# EAGLE board PCB (EAGLE 9.7.0)
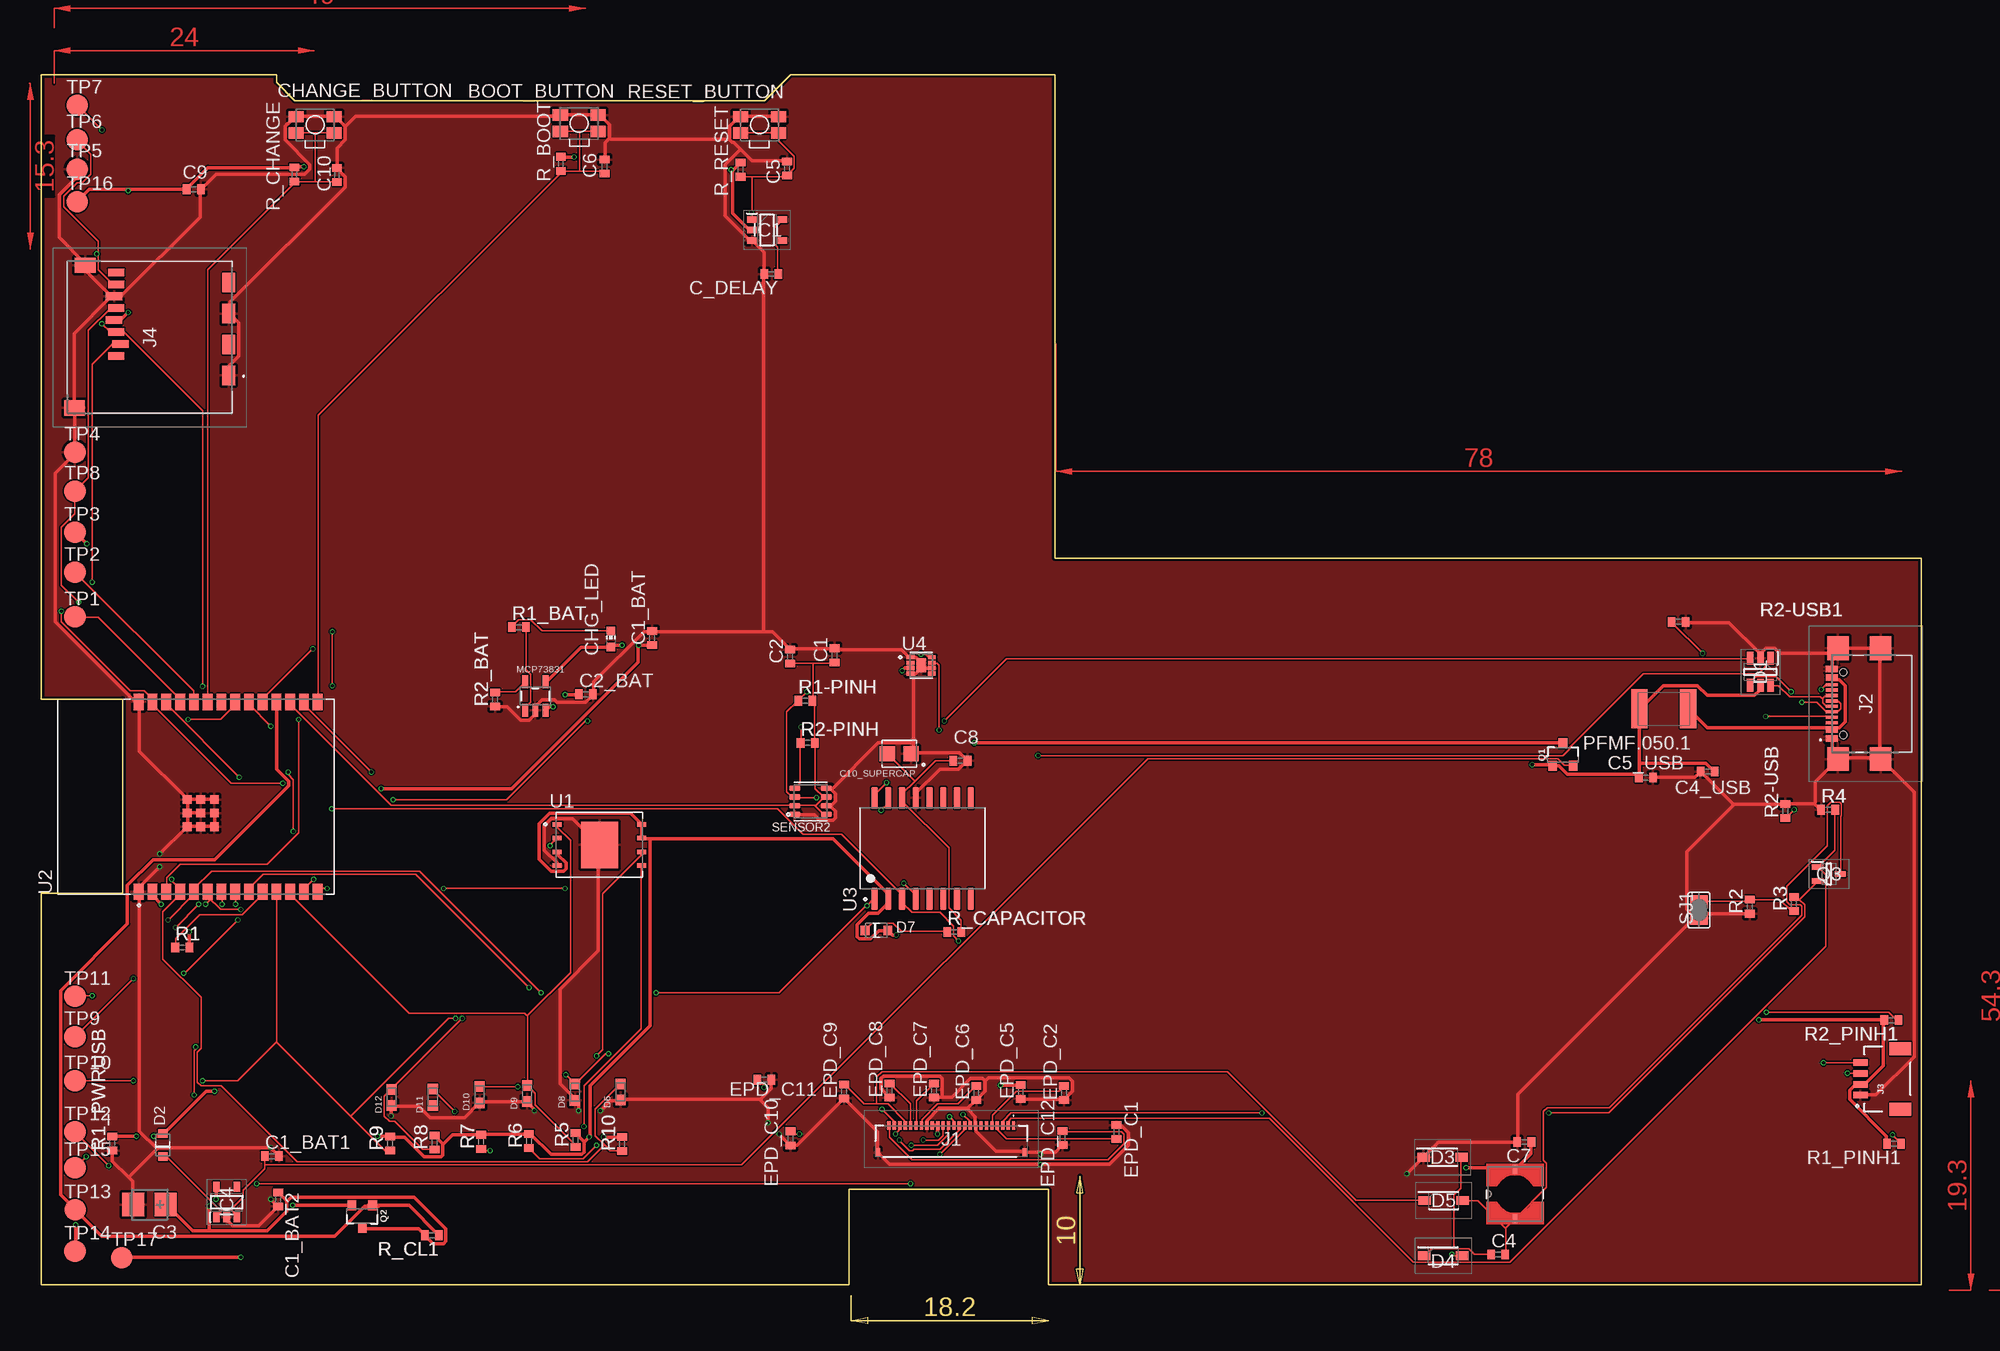
[diagram p0: board, top side]
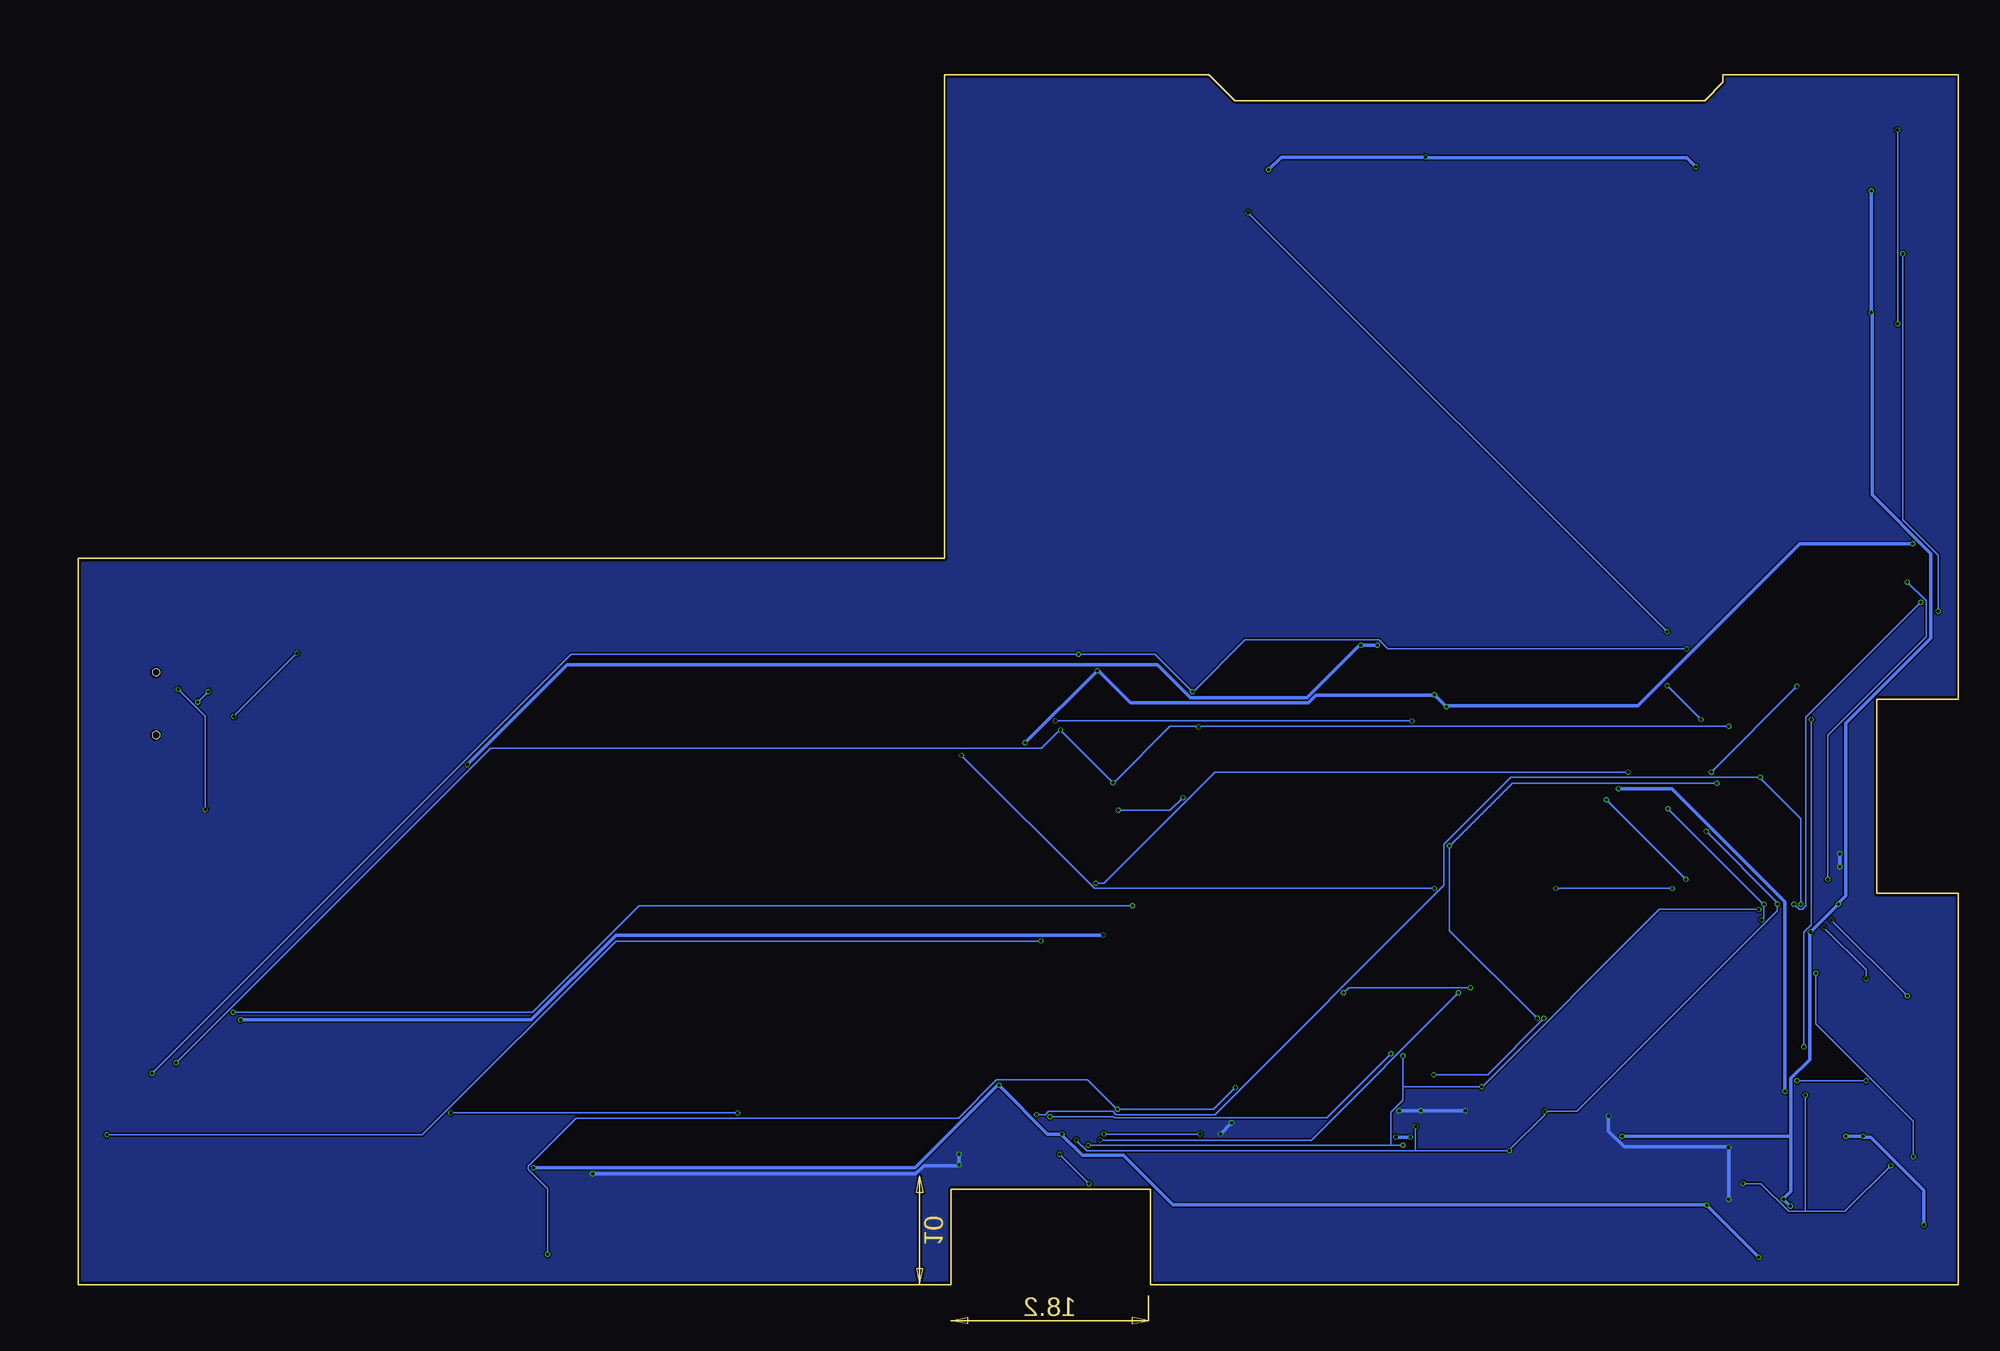
[diagram p1: board, bottom side, seen from below]

Size 173.4 x 115.2 mm. Coordinates in mm from the lower left corner, seen from the top.
Outline: 0,3.6 74.5,3.6 74.5,12.4 92.9,12.4 92.9,3.6 173.4,3.6 173.4,70.6 93.5,70.6 93.5,115.2 69.1,115.2 66.7,112.8 23.4,112.8 21.7,114.5 21.7,115.2 0,115.2 0,57.6 7.5,57.6 7.5,39.7 0,39.7 0,3.6
Copper layers (1*16): Top 0.035mm / dielectric 1.6mm / Bottom 0.035mm
Design rules "jlcpcb-2layers.dru": minimum track width 0.15mm, minimum drill 0.3mm, track to track 5mil, track to pad 5mil, pad to pad 5mil, via to via 5mil, smd to smd 5mil, copper to edge 0.2mm, drill to drill 6mil, minimum pad ring 10mil, minimum via ring 3mil, stop-mask expansion 4mil, vias tented up to drill 0mil, thermal gap 10mil
Net classes: 1 class-1: width 0.3 mm

## Footprints (pad centres in the part's own frame; a part is rotated, then mirrored left to right if it is on the bottom)
MYBUTTON = smd 1.4 x 1.05: 1 1.75,0.75; 2 -1.75,0.75; 3 -1.75,-0.75; 4 1.75,-0.75
ESP32_WROVER_EAGLE-LTSPICE_C0402 = smd 0.7 x 0.9: 1 -0.65,0; 2 0.65,0
RCL_CT3528 = smd 2 x 2.2: + -1.5,0; - 1.5,0
CAPCP3225X100N = smd 1.4 x 1.4: 1 -1.1,0; 2 1.1,0
ADAFRUIT_CHIP-LED0603 = smd 0.8 x 0.8: A 0,-0.75; C 0,0.75
SOT95P280X145-6N = smd 1.2 x 0.6: 1 -1.25,0.95; 2 -1.25,0; 3 -1.25,-0.95; 4 1.25,-0.95; 5 1.25,0; 6 1.25,0.95
ESP32_WROVER_AVX---SD0805S020S1R0_AVX_SD0805S020S1R0_0 = smd 0.8 x 0.9: 1 -1.05,0; 2 1.05,0
SOD3716X135N = smd 1.15 x 0.8: 1 -1.75,0; 2 1.75,0
DIOC1608X36N = smd 0.97 x 0.94: 1 -0.75,0; 2 0.75,0
SOT95P280X125-5N = smd 0.9 x 0.6: 1 -1.4,0.95; 2 -1.4,0; 3 -1.4,-0.95; 4 1.4,-0.95; 5 1.4,0.95
SOT95P280X120-5N = smd 0.9 x 0.6: 1 -1.4,0.95; 2 -1.4,0; 3 -1.4,-0.95; 4 1.4,-0.95; 5 1.4,0.95
FH34SRJ24S05SH99 = smd 0.3 x 0.8: 1 5.75,1.45; 2 5.25,1.45; 3 4.75,1.45; 4 4.25,1.45; 5 3.75,1.45; 6 3.25,1.45; 7 2.75,1.45; 8 2.25,1.45; 9 1.75,1.45; 10 1.25,1.45; 11 0.75,1.45; 12 0.25,1.45; 13 -0.25,1.45; 14 -0.75,1.45; 15 -1.25,1.45; 16 -1.75,1.45; 17 -2.25,1.45; 18 -2.75,1.45; 19 -3.25,1.45; 20 -3.75,1.45; 21 -4.25,1.45; 22 -4.75,1.45; 23 -5.25,1.45; 24 -5.75,1.45 | smd 0.4 x 0.8: MP1 6.75,-1.05; MP2 -6.75,-1.05
SAMACSYS_PARTS_USB4110GFA = smd 0.3 x 1.15: A1 -3.35,3.678; A4 -2.55,3.678; A5 -1.25,3.678; A6 -0.25,3.678; A7 0.25,3.678; A8 1.25,3.678; A9 2.55,3.678; A12 3.35,3.678; B1 3.05,3.678; B4 2.25,3.678; B5 1.75,3.678; B6 0.75,3.678; B7 -0.75,3.678; B8 -1.75,3.678; B9 -2.25,3.678; B12 -3.05,3.678 | smd 2.18 x 2: MP1 -5.11,-0.827; MP2 5.11,-0.827; MP3 -5.11,3.103; MP4 5.11,3.103 | hole 0.65: -2.89,2.603; 2.89,2.603
JST04_1MM_RA = smd 0.6 x 1.35: 1 -1.5,0; 2 -0.5,0; 3 0.5,0; 4 1.5,0 | smd 1.2 x 2: NC1 2.8,-3.675; NC2 -2.8,-3.675
112ATAARR03ATTEND = smd 1.8 x 1.2: G1 10.6,10.4; G2 4.9,10.4; S1 7.75,10.4; S2 2.05,10.4 | smd 1.4 x 1.9: G3 13.6,-3.85; G4 0.45,-2.85 | smd 0.7 x 1.5: P1 8.8,0; P2 7.7,0.4; P3 6.6,0; P4 5.5,-0.2; P5 4.4,0; P6 3.3,-0.2; P7 2.2,0; P8 1.1,0
IND_4828-WE-TPC_WRE = smd 0.813 x 0.406: 1 -2.286,0; 2 2.286,0
ESP32_WROVER_SPARKFUN-IC-POWER_SOT23-5 = smd 0.55 x 1.2: 1 -0.95,-1.3; 2 0,-1.3; 3 0.95,-1.3; 4 0.95,1.3; 5 -0.95,1.3
ESP32C6_VARISTOR_CT/CN1812 = smd 1.5 x 3.6: 1 -2.25,0; 2 2.25,0
ESP32_WROVER_SPARKFUN-DISCRETESEMI_SOT23-3 = smd 0.8 x 0.9: 1 -0.95,-1; 2 0.95,-1; 3 0,1.1
SOT65P210X110-3N = smd 1.05 x 0.5: 1 -1.05,0.65; 2 -1.05,-0.65; 3 1.05,0
ESP32_WROVER_EAGLE-LTSPICE_R0402 = smd 0.7 x 0.9: 1 -0.65,0; 2 0.65,0
ESP32_WROVER_BME680_PSON80P300X300X100-8N = smd 1.016 x 0.5: 1 1.458,1.2; 2 1.458,0.4; 3 1.458,-0.4; 4 1.458,-1.2; 5 -1.458,-1.22; 6 -1.458,-0.4; 7 -1.458,0.4; 8 -1.458,1.2
SJ = smd 1.168 x 1.6: 1 -0.762,0; 2 0.762,0
TP20R = smd 2 x 2: TP 0,0
SON127P600X800X80-9N = smd 0.94 x 0.44: 1 -3.895,1.905; 2 -3.895,0.635; 3 -3.895,-0.635; 4 -3.895,-1.905; 5 3.895,-1.905; 6 3.895,-0.635; 7 3.895,0.635; 8 3.895,1.905 | smd 3.4 x 4.3: 9 0,0
XCVR_ESP32-C6-WROOM-1-N8 = smd 1.5 x 0.9: 1 -8.75,5.26; 2 -8.75,3.99; 3 -8.75,2.72; 4 -8.75,1.45; 5 -8.75,0.18; 6 -8.75,-1.09; 7 -8.75,-2.36; 8 -8.75,-3.63; 9 -8.75,-4.9; 10 -8.75,-6.17; 11 -8.75,-7.44; 12 -8.75,-8.71; 13 -8.75,-9.98; 14 -8.75,-11.25; 15 8.75,-11.25; 16 8.75,-9.98; 17 8.75,-8.71; 18 8.75,-7.44; 19 8.75,-6.17; 20 8.75,-4.9; 21 8.75,-3.63; 22 8.75,-2.36; 23 8.75,-1.09; 24 8.75,0.18; 25 8.75,1.45; 26 8.75,2.72; 27 8.75,3.99; 28 8.75,5.26 | smd 0.8 x 0.8: 29_1 -2.755,0.79; 29_2 -1.505,0.79; 29_3 -0.255,0.79; 29_4 -2.755,-0.46; 29_5 -1.505,-0.46; 29_6 -0.255,-0.46; 29_7 -2.755,-1.71; 29_8 -1.505,-1.71; 29_9 -0.255,-1.71
SOIC127P1032X265-16N = smd 2.05 x 0.59: 1 -4.655,4.445; 2 -4.655,3.175; 3 -4.655,1.905; 4 -4.655,0.635; 5 -4.655,-0.635; 6 -4.655,-1.905; 7 -4.655,-3.175; 8 -4.655,-4.445; 9 4.655,-4.445; 10 4.655,-3.175; 11 4.655,-1.905; 12 4.655,-0.635; 13 4.655,0.635; 14 4.655,1.905; 15 4.655,3.175; 16 4.655,4.445
SON50P200X200X80-9N = smd 0.813 x 0.406: 1 -0.985,0.75; 2 -0.985,0.25; 3 -0.985,-0.25; 4 -0.985,-0.75; 5 0.985,-0.75; 6 0.985,-0.25; 7 0.985,0.25; 8 0.985,0.75 | smd 0.9 x 1.3: 9 0,0

## Placement (x,y rotation side)
BOOT_BUTTON  BUTTON_CUSYOMV1BUTON  [MYBUTTON]  49.63,110.71 0 top
C1  100nF  [ESP32_WROVER_EAGLE-LTSPICE_C0402]  73.17,61.65 90 top
C1_BAT  4.7uF  [ESP32_WROVER_EAGLE-LTSPICE_C0402]  56.35,63.24 90 top
C1_BAT1  4.7uF  [ESP32_WROVER_EAGLE-LTSPICE_C0402]  21.28,15.47 0 top
C1_BAT2  4.7uF  [ESP32_WROVER_EAGLE-LTSPICE_C0402]  21.87,11.48 270 top
C2  100nF  [ESP32_WROVER_EAGLE-LTSPICE_C0402]  69.07,61.53 90 top
C2_BAT  4.7uF  [ESP32_WROVER_EAGLE-LTSPICE_C0402]  50.25,58.05 0 top
C3  100uF TANT  [RCL_CT3528]  9.99,11 180 top
C4  4.7uF/25V  [ESP32_WROVER_EAGLE-LTSPICE_C0402]  134.39,6.39 0 top
C4_USB  100nF  [ESP32_WROVER_EAGLE-LTSPICE_C0402]  153.7,50.93 180 top
C5  1uF  [ESP32_WROVER_EAGLE-LTSPICE_C0402]  68.79,106.55 90 top
C5_USB  4.7uF  [ESP32_WROVER_EAGLE-LTSPICE_C0402]  148.01,50.37 0 top
C6  100nF  [ESP32_WROVER_EAGLE-LTSPICE_C0402]  51.97,106.71 90 top
C7  10uF  [ESP32_WROVER_EAGLE-LTSPICE_C0402]  136.8,16.77 180 top
C8  100nF  [ESP32_WROVER_EAGLE-LTSPICE_C0402]  84.79,51.93 0 top
C9  100nF  [ESP32_WROVER_EAGLE-LTSPICE_C0402]  14.07,104.63 0 top
C10  100nF  [ESP32_WROVER_EAGLE-LTSPICE_C0402]  27.27,105.95 90 top
C10_SUPERCAP  CPH3225ASUPERCAP  [CAPCP3225X100N]  79.14,52.56 180 top
C_DELAY  100nF  [ESP32_WROVER_EAGLE-LTSPICE_C0402]  67.33,96.81 180 top
CHANGE_BUTTON  BUTTON_CUSYOMV1BUTON  [MYBUTTON]  25.26,110.56 0 top
CHG_LED  [ADAFRUIT_CHIP-LED0603]  52.54,63.15 0 top
D1  USBLC6-2SC6YUSBL  [SOT95P280X145-6N]  158.57,60.12 270 top
D2  ESP32_WROVER_AVX---SD0805S020S1R0_AVX_SD0805S020S1R0_0_0  [ESP32_WROVER_AVX---SD0805S020S1R0_AVX_SD0805S020S1R0_0]  11.22,16.49 90 top
D3  MBR0530MBR  [SOD3716X135N]  129.26,15.37 0 top
D4  MBR0530MBR  [SOD3716X135N]  129.32,6.28 0 top
D5  MBR0530MBR  [SOD3716X135N]  129.36,11.38 0 top
D6  PGB1010603MRDIOC  [DIOC1608X36N]  53.43,21.38 90 top
D7  ESP32_WROVER_AVX---SD0805S020S1R0_AVX_SD0805S020S1R0_0_0  [ESP32_WROVER_AVX---SD0805S020S1R0_AVX_SD0805S020S1R0_0]  77.04,36.28 0 top
D8  PGB1010603MRDIOC  [DIOC1608X36N]  49.23,21.36 90 top
D9  PGB1010603MRDIOC  [DIOC1608X36N]  44.83,21.24 90 top
D10  PGB1010603MRDIOC  [DIOC1608X36N]  40.43,21.12 90 top
D11  PGB1010603MRDIOC  [DIOC1608X36N]  36.13,20.9 90 top
D12  PGB1010603MRDIOC  [DIOC1608X36N]  32.33,20.88 90 top
EPD_C1  1uF/50V  [ESP32_WROVER_EAGLE-LTSPICE_C0402]  99.17,17.68 270 top
EPD_C2  1uF/50V  [ESP32_WROVER_EAGLE-LTSPICE_C0402]  94.35,21.28 90 top
EPD_C5  1uF/50V  [ESP32_WROVER_EAGLE-LTSPICE_C0402]  90.35,21.39 90 top
EPD_C6  1uF/50V  [ESP32_WROVER_EAGLE-LTSPICE_C0402]  86.25,21.3 90 top
EPD_C7  1uF/50V  [ESP32_WROVER_EAGLE-LTSPICE_C0402]  82.35,21.51 90 top
EPD_C8  1uF/50V  [ESP32_WROVER_EAGLE-LTSPICE_C0402]  78.25,21.52 90 top
EPD_C9  1uF/50V  [ESP32_WROVER_EAGLE-LTSPICE_C0402]  74.05,21.43 90 top
EPD_C10  1uF/50V  [ESP32_WROVER_EAGLE-LTSPICE_C0402]  69.11,17.11 90 top
EPD_C11  1uF/50V  [ESP32_WROVER_EAGLE-LTSPICE_C0402]  66.71,22.51 180 top
EPD_C12  1uF/50V  [ESP32_WROVER_EAGLE-LTSPICE_C0402]  94.21,17.15 90 top
IC1  BD5229G-TRBD5229  [SOT95P280X125-5N]  66.95,100.87 0 top
IC4  XC6220A331MR-G  [SOT95P280X120-5N]  17.11,11.23 90 top
J1  FH34SRJ-24S-0.5SH_99_FH34  [FH34SRJ24S05SH99]  83.94,16.84 0 top
J2  SAMACSYS_PARTS_USB4110-GF-AUSB  [SAMACSYS_PARTS_USB4110GFA]  168.84,57.19 90 top
J3  QWIIC_RIGHT_ANGLE  [JST04_1MM_RA]  167.81,22.58 90 top
J4  112A-TAAR-R03_ATTENDSDCARD  [112ATAARR03ATTEND]  6.92,98.06 270 top
L1  68uH  [IND_4828-WE-TPC_WRE]  135.95,11.97 90 top
MCP73831  ESP32_WROVER_SPARKFUN-IC-POWER_MCP73831ICPOWER  [ESP32_WROVER_SPARKFUN-IC-POWER_SOT23-5]  45.58,57.89 0 top
PFMF.050.1  ESP32C6_VARISTOR  [ESP32C6_VARISTOR_CT/CN1812]  149.66,56.7 180 top
Q1  20V/4.2A/52mΩ/1.4W  [ESP32_WROVER_SPARKFUN-DISCRETESEMI_SOT23-3]  140.36,52.46 0 top
Q2  20V/4.2A/52mΩ/1.4W  [ESP32_WROVER_SPARKFUN-DISCRETESEMI_SOT23-3]  29.62,9.94 180 top
Q3  SI1308EDL-T1-GE3SI13  [SOT65P210X110-3N]  164.89,41.48 0 top
R1  10K  [ESP32_WROVER_EAGLE-LTSPICE_R0402]  13.01,34.71 0 top
R1-PINH  10K  [ESP32_WROVER_EAGLE-LTSPICE_R0402]  70.48,57.47 0 top
R1_BAT  200  [ESP32_WROVER_EAGLE-LTSPICE_R0402]  44.06,64.25 0 top
R1_PINH1  10K  [ESP32_WROVER_EAGLE-LTSPICE_R0402]  170.89,16.61 180 top
R1_PWRUSB  100K  [ESP32_WROVER_EAGLE-LTSPICE_R0402]  6.56,16.62 90 top
R2  2.2  [ESP32_WROVER_EAGLE-LTSPICE_R0402]  157.59,38.47 90 top
R2-PINH  10K  [ESP32_WROVER_EAGLE-LTSPICE_R0402]  70.69,53.57 0 top
R2-USB  5k1  [ESP32_WROVER_EAGLE-LTSPICE_R0402]  160.87,47.29 90 top
R2-USB1  5k1  [ESP32_WROVER_EAGLE-LTSPICE_R0402]  151.04,64.73 180 top
R2_BAT  2K  [ESP32_WROVER_EAGLE-LTSPICE_R0402]  41.87,57.58 90 top
R2_PINH1  10K  [ESP32_WROVER_EAGLE-LTSPICE_R0402]  170.65,28.01 180 top
R3  0.47  [ESP32_WROVER_EAGLE-LTSPICE_R0402]  161.67,38.72 90 top
R4  10K  [ESP32_WROVER_EAGLE-LTSPICE_R0402]  164.83,47.41 0 top
R5  10K  [ESP32_WROVER_EAGLE-LTSPICE_R0402]  49.29,16.95 90 top
R6  10K  [ESP32_WROVER_EAGLE-LTSPICE_R0402]  44.99,16.87 90 top
R7  10K  [ESP32_WROVER_EAGLE-LTSPICE_R0402]  40.59,16.79 90 top
R8  10K  [ESP32_WROVER_EAGLE-LTSPICE_R0402]  36.29,16.71 90 top
R9  10K  [ESP32_WROVER_EAGLE-LTSPICE_R0402]  32.19,16.63 90 top
R10  10K  [ESP32_WROVER_EAGLE-LTSPICE_R0402]  53.59,16.59 90 top
R_BOOT  10K  [ESP32_WROVER_EAGLE-LTSPICE_R0402]  47.93,106.97 90 top
R_CAPACITOR  15  [ESP32_WROVER_EAGLE-LTSPICE_R0402]  84.22,36.14 0 top
R_CHANGE  10K  [ESP32_WROVER_EAGLE-LTSPICE_R0402]  23.36,105.99 90 top
R_CL1  10K  [ESP32_WROVER_EAGLE-LTSPICE_R0402]  36.03,8.17 180 top
R_RESET  10K  [ESP32_WROVER_EAGLE-LTSPICE_R0402]  64.51,106.43 90 top
RESET_BUTTON  BUTTON_CUSYOMV1BUTON  [MYBUTTON]  66.25,110.56 0 top
SENSOR2  ESP32_WROVER_BME680_BME680BME  [ESP32_WROVER_BME680_PSON80P300X300X100-8N]  70.96,48.18 180 top
SJ1  [SJ]  152.91,38.16 90 top
TP1  TPMODEL  [TP20R]  3.12,65.19 0 top
TP2  TPMODEL  [TP20R]  3.12,69.29 0 top
TP3  TPMODEL  [TP20R]  3.12,72.99 0 top
TP4  TPTP20R  [TP20R]  3.12,80.39 0 top
TP5  TPTP20R  [TP20R]  3.32,106.49 0 top
TP6  TPTP20R  [TP20R]  3.32,109.19 0 top
TP7  TPMODEL  [TP20R]  3.32,112.38 0 top
TP8  TPMODEL  [TP20R]  3.12,76.79 0 top
TP9  TPMODEL  [TP20R]  3.12,26.49 0 top
TP10  TPMODEL  [TP20R]  3.12,22.41 0 top
TP11  TPTP20R  [TP20R]  3.12,30.19 0 top
TP12  TPMODEL  [TP20R]  3.12,17.71 0 top
TP13  TPMODEL  [TP20R]  3.12,10.51 0 top
TP14  TPTP20R  [TP20R]  3.12,6.71 0 top
TP15  TPMODEL  [TP20R]  3.12,14.41 0 top
TP16  TPMODEL  [TP20R]  3.32,103.49 0 top
TP17  TPMODEL  [TP20R]  7.44,6.12 0 top
U1  W25Q512JVEIQ"  [SON127P600X800X80-9N]  51.49,44.16 0 top
U2  ESP32-C6-WROOM-1-N8  [XCVR_ESP32-C6-WROOM-1-N8]  14.26,48.6 90 top
U3  DS3231SN#DS3231  [SOIC127P1032X265-16N]  81.3,43.85 90 top
U4  MAX17048G+T10MAX170  [SON50P200X200X80-9N]  81.17,60.72 0 top

## Library data of the parts
BOOT_BUTTON C1 C1_BAT C1_BAT1 C1_BAT2 C2 C2_BAT C3 C4 C4_USB C5 C5_USB C6-C10 C10_SUPERCAP C_DELAY CHANGE_BUTTON CHG_LED D1-D12 EPD_C1 EPD_C2 EPD_C5-EPD_C12 IC1 J1-J4 L1 MCP73831 PFMF.050.1 Q1-Q3 R1 R1-PINH R1_BAT R1_PINH1 R1_PWRUSB R2 R2-PINH R2-USB R2-USB1 R2_BAT R2_PINH1 R3-R10 R_BOOT R_CAPACITOR R_CHANGE R_CL1 R_RESET RESET_BUTTON SENSOR2 SJ1 TP1-TP17 U1-U4 = DeskAssistant v19 v1
IC4 = DeskAssistant v19 v1; DESCRIPTION: LDO Voltage Regulators; HEIGHT: 1.2mm; MANUFACTURER_NAME: Torex; MANUFACTURER_PART_NUMBER: XC6220A331MR-G; MOUSER_PART_NUMBER: 865-XC6220A331MR-G; MOUSER_PRICE-STOCK: https://www.mouser.co.uk/ProductDetail/Torex-Semiconductor/XC6220A331MR-G?qs=AsjdqWjXhJ8ZSWznL1J0gg%3D%3D

## Nets
3V3 [class-1]: C1_BAT2.1 C3.+ C9.1 D7.2 IC1.2 IC4.5 J3.2 J4.P4 Q2.3 R1.2 R1_PINH1.2 R2_PINH1.2 R5.2 R6.2 R7.2 R8.2 R9.2 R10.2 R_BOOT.2 R_CHANGE.2 R_CL1.2 R_RESET.2 TP16.TP U1.3 U1.7 U1.8 U2.2 U3.2
32KHZ: R2_PINH1.1 U2.9 U3.1
DN: D1.4 J2.A7 J2.B7
DP: D1.6 J2.A6 J2.B6
EPD_3V3 [class-1]: C7.1 EPD_C5.2 J1.15 J1.16 L1.2 Q2.2 TP17.TP
EPD_3V3_C [class-1]: Q2.1 R_CL1.1 TP13.TP U2.18
EPD_BUSY: J1.9 TP9.TP U2.26
EPD_CS: D8.2 J1.12 R9.1 TP10.TP U2.11
EPD_DC: J1.11 TP11.TP U2.5
EPD_RST: J1.10 TP12.TP U2.21
FLASH_CS: D9.2 R5.1 U1.1 U2.12
GDR: J1.2 Q3.1 R4.2
GND [class-1]: BOOT_BUTTON.1 BOOT_BUTTON.2 C1.2 C1_BAT1.2 C1_BAT2.2 C1_BAT.2 C2.2 C2_BAT.2 C3.- C4_USB.2 C5.2 C5_USB.2 C6.2 C7.2 C8.2 C9.2 C10.2 C10_SUPERCAP.1 C_DELAY.2 CHANGE_BUTTON.1 CHANGE_BUTTON.2 D1.2 D3.1 D6.1 D8.1 D9.1 D10.1 D12.1 EPD_C1.1 EPD_C2.1 EPD_C5.1 EPD_C6.1 EPD_C7.1 EPD_C8.1 EPD_C9.1 EPD_C10.1 EPD_C11.1 EPD_C12.1 IC1.3 IC4.2 J1.8 J1.17 J1.MP1 J1.MP2 J2.A1 J2.A12 J2.B1 J2.B12 J2.MP1 J2.MP2 J2.MP3 J2.MP4 J3.1 J4.G1 J4.G2 J4.G3 J4.G4 J4.P6 MCP73831.2 R1_PWRUSB.1 R2-USB1.1 R2-USB.2 R2.1 R2_BAT.1 R4.1 RESET_BUTTON.1 RESET_BUTTON.2 SENSOR2.1 SENSOR2.5 SENSOR2.7 SJ1.1 TP4.TP TP5.TP U1.4 U1.9 U2.1 U2.28 U2.29_1 U2.29_2 U2.29_3 U2.29_4 U2.29_5 U2.29_6 U2.29_7 U2.29_8 U2.29_9 U3.13 U4.1 U4.4 U4.6 U4.9
GPIO8: R1.1 U2.10
I2C_PW: C1.1 C2.1 R1-PINH.2 R2-PINH.2 SENSOR2.2 SENSOR2.6 SENSOR2.8 U2.17
INT_RTC: R1_PINH1.1 TP15.TP U2.8 U3.3
IO/BOOT: BOOT_BUTTON.3 BOOT_BUTTON.4 C6.1 R_BOOT.1 U2.15
IO/CHANGE: C10.1 CHANGE_BUTTON.3 CHANGE_BUTTON.4 R_CHANGE.1 U2.23
MISO: D12.2 J4.P7 R8.1 TP6.TP U1.2 U2.27
MOSI: D11.2 J1.14 J4.P3 R7.1 TP7.TP U1.5 U2.7
N$1: J2.B5 R2-USB.1
N$2: J2.A5 R2-USB1.2
N$3: C1_BAT1.1 D2.1 IC4.1 IC4.3 Q1.2
N$4: C4.1 D3.2 D4.1
N$5: CHG_LED.C R1_BAT.1
N$6: MCP73831.1 R1_BAT.2
N$7: MCP73831.5 R2_BAT.2
N$8: EPD_C12.2 J1.24
N$9: EPD_C8.2 J1.20
N$10: EPD_C10.2 J1.22
N$11: EPD_C7.2 J1.19
N$12: EPD_C6.2 J1.18
N$13: EPD_C2.2 J1.5
N$14: EPD_C1.2 J1.4
N$15: C_DELAY.1 IC1.5
N$16: D7.1 R_CAPACITOR.1
N$26: D11.1
PREVGH: D5.1 EPD_C9.2 J1.21
PREVGL: D4.2 EPD_C11.2 J1.23
RESE: J1.3 Q3.2 R3.2
RESE': R2.2 R3.1 SJ1.2
RESET: C5.1 IC1.1 R_RESET.1 RESET_BUTTON.3 RESET_BUTTON.4 U2.3
RTC_RST: U2.16 U3.4
RX: TP2.TP U2.24
SCK: D10.2 J1.13 J4.P5 R6.1 TP8.TP U1.6 U2.6
SCL: J3.4 R2-PINH.1 SENSOR2.4 U2.20 U3.16 U4.7
SDA: J3.3 R1-PINH.1 SENSOR2.3 U2.19 U3.15 U4.8
SRC: C4.2 D5.2 L1.1 Q3.3
SS_SD: D6.2 J4.P2 R10.1 U2.4
TX: TP1.TP U2.25
USB_D+: D1.1 U2.14
USB_D-: D1.3 U2.13
VBAT [class-1]: C2_BAT.1 MCP73831.3 Q1.3 TP3.TP U4.2 U4.3
VBUS [class-1]: C1_BAT.1 C4_USB.1 C5_USB.1 CHG_LED.A D1.5 D2.2 MCP73831.4 PFMF.050.1.2 Q1.1 R1_PWRUSB.2 TP14.TP
VRTC: C8.1 C10_SUPERCAP.2 R_CAPACITOR.2 U3.14
VUSB [class-1]: J2.A4 J2.A9 J2.B4 J2.B9 PFMF.050.1.1

## Tracks (layer width: path | path; a pad name or v marks a point on that pad's centre or on a via)
3V3  (via drill 0.3)
  Top 0.3: 63.77,106.35 63.77,102.4 65.29,100.88 65.5,100.88 IC1.2 | 63.77,106.35 64.46,107.04 R_RESET.2 | v49.16,107.6 47.98,107.6 R_BOOT.2 | v63.63,106.42 63.77,106.35 | 8.03,104.62 4.42,104.62 3.32,103.51 TP16.TP | 8.03,104.62 13.36,104.62 C9.1 13.5,104.76 15.37,106.63 23.33,106.63 R_CHANGE.2 23.47,106.7 v24.23,106.7 | v8.03,93.26 7.33,92.57 6.78,92.57 J4.P4 | v8.03,104.48 8.03,104.62 | v13.63,36.13 13.63,34.75 R1.2 | v11.07,38.69 10.31,39.46 10.31,39.8 U2.2 | 22.64,11.34 21.88,12.1 C1_BAT2.1 | 22.64,11.34 22.64,10.37 20.84,8.57 15.5,8.57 | 15.5,8.57 13.98,8.57 11.56,10.99 C3.+ | v16.13,11.48 16.13,12.59 IC4.5 | 15.5,8.57 v15.5,10.86 | 22.64,11.34 22.78,11.41 23.05,11.69 34.41,11.69 37.32,8.78 37.32,7.6 37.11,7.39 36.14,7.39 35.45,8.09 R_CL1.2 35.38,8.22 34.83,8.78 29.68,8.78 Q2.3 | 37.04,16.6 37.04,15.56 36.9,15.43 35.31,15.43 33.51,17.23 32.19,17.23 R9.2 32.05,17.3 v31.02,17.3 | 37.04,16.6 36.35,17.3 R8.2 | 37.04,16.6 37.18,16.67 37.94,17.43 40.57,17.43 R7.2 40.71,17.5 44.94,17.5 R6.2 45.14,17.5 47.01,15.63 49.85,15.63 50.06,15.84 50.06,16.81 | 50.06,16.81 49.3,17.57 R5.2 | v51.86,17.23 53.52,17.23 R10.2 | 50.06,16.81 50.2,16.88 v50.54,17.23 50.61,17.37 50.61,21.94 56.15,27.48 56.15,44.72 | R1_PINH1.2 170.21,16.67 170.21,17.3 166.81,20.69 166.81,21.52 167.37,22.07 167.78,22.07 J3.2 167.92,22.14 168.27,22.14 169.93,23.8 169.93,27.96 R2_PINH1.2 169.79,28.03 v158.44,28.03 | U1.3 47.64,43.47 47.64,43.27 48.4,42.5 48.4,41.95 48.19,41.74 47.01,41.74 45.91,42.85 45.91,46.1 46.87,47.07 54.35,47.07 55.32,46.1 U1.8 55.39,45.97 55.39,44.86 U1.7 55.46,44.72 56.15,44.72
  Top 0.3: 56.15,44.72 73.05,44.72 78.04,39.73 78.04,39.32 U3.2 78.11,39.18 78.11,38.76 77.21,37.86 76.31,37.86 75.27,36.83 75.27,35.72 75.47,35.51 76.51,35.51 77.27,36.27 78.04,36.27 D7.2 78.17,36.2 78.52,35.86 v78.87,35.86
  Bottom 0.3: v63.63,106.42 62.45,107.6 v49.16,107.6 49.02,107.53 25.06,107.53 v24.23,106.7 | v8.03,104.48 v8.03,93.26 7.96,93.12 7.96,76.44 2.55,71.03 2.55,63.21 10.38,55.38 10.38,39.46 11,38.83 v11.07,38.69 v13.63,36.13 13.7,35.99 13.7,24.36 15.44,22.63 15.44,17.3 | v15.5,10.86 v16.13,11.48 16.06,11.62 15.44,12.24 15.44,17.3 | v50.54,17.23 v51.86,17.23 | v158.44,28.03 131.64,28.03 123.81,35.86 v78.87,35.86 | v31.02,17.3 15.44,17.3
32KHZ  (via drill 0.3)
  Top 0.15: v159.13,28.72 170.42,28.72 171.11,28.03 171.25,28.03 R2_PINH1.1 | U3.1 76.79,39.18 v76.17,38.56 76.1,38.56 68.06,30.52 v56.71,30.52 | v45,31.01 34.55,41.46 20.49,41.46 19.17,40.15 19.17,39.87 U2.9
  Bottom 0.15: v159.13,28.72 131.5,28.72 121.66,38.56 v76.17,38.56 | v45,31.01 56.22,31.01 v56.71,30.52
DN  (via drill 0.3)
  Top 0.15: J2.A7 165.22,57.39 165.78,57.39 165.98,57.18 165.98,56.7 165.78,56.49 165.22,56.49 J2.B7 165.15,56.49 164.6,56.49 163.77,57.32 v162.38,57.32 | v161.41,58.29 160.03,59.68 158.16,59.68 157.67,59.19 157.67,58.91 D1.4
  Bottom 0.15: v162.38,57.32 v161.41,58.29
DP
  Top 0.15: 164.32,57.67 164.32,57.25 164.6,56.98 165.15,56.98 J2.A6 | 164.32,57.67 164.53,57.88 165.15,57.88 J2.B6 | D1.6 159.54,58.85 160.24,58.85 161.28,57.81 164.11,57.81 164.25,57.67 164.32,57.67
EPD_3V3  (via drill 0.3)
  Top 0.3: v23.19,10.93 28.66,10.93 Q2.2 | v18.41,6.15 7.47,6.15 TP17.TP | C7.1 137.38,16.74 137.38,15.7 136,14.32 L1.2 135.86,14.39 v131.43,14.39 | J1.16 82.19,18.34 82.68,18.34 J1.15 82.68,18.2 v82.68,17.5 | v88.49,22 90.29,22 EPD_C5.2
  Bottom 0.3: v18.41,6.15 v23.19,10.93 23.33,10.99 72.43,10.99 77,15.56 80.81,15.56 82.61,17.37 v82.68,17.5 83.99,17.5 v88.49,22 88.63,22 96.25,14.39 v131.43,14.39
EPD_3V3_C
  Top 0.3: 31.2,10.93 33.93,10.93 36.62,8.22 R_CL1.1 | 30.6,10.93 Q2.1 30.46,10.86 | U2.18 21.74,57.32 21.74,51.16 22.84,50.05 22.84,49.64 15.99,42.78 10.31,42.78 7.96,40.42 7.96,36.89 1.79,30.73 1.79,11.89 3.11,10.58 TP13.TP 3.25,10.44 5.6,8.09 27.07,8.09 29.84,10.86 30.1,10.86 | 30.1,10.86 30.46,10.86 | 30.1,10.86 30.17,10.93 30.6,10.93 | 31.2,10.93 31.13,10.86 30.46,10.86 | 31.2,10.93 30.6,10.93
EPD_BUSY  (via drill 0.3)
  Top 0.15: v85.03,19.3 85.65,18.68 85.65,18.34 J1.9 | v18.27,50.4 11.56,57.12 11.56,57.32 U2.26 | v8.51,31.84 3.18,26.51 TP9.TP | v14.53,38.69 v12.39,36.55
  Bottom 0.15: v85.03,19.3 84.2,19.3 83.92,19.58 77.97,19.58 77.69,19.3 68.55,19.3 47.43,40.42 47.43,44.23 41.27,50.4 v18.27,50.4 18.27,50.33 14.53,46.59 v14.53,38.69 | v8.51,31.84 8.51,32.67 v12.39,36.55
EPD_CS  (via drill 0.3)
  Top 0.15: v83.78,19.1 84.13,18.75 84.13,18.34 J1.12 | v52.34,24.91 52.07,24.91 49.3,22.14 D8.2 49.23,22.14 v48.4,22.97 | 21.74,25.95 28.56,19.13 | 28.56,19.13 31.71,15.98 32.12,15.98 R9.1 | 21.74,25.95 21.74,39.8 U2.11 | v8.51,22.42 3.18,22.42 TP10.TP | v14.88,22.42 18.14,22.42 21.67,25.95 21.74,25.95 | v38.22,28.17 37.59,28.17 28.56,19.13
  Bottom 0.15: v83.78,19.1 77.9,19.1 77.83,19.03 58.23,19.03 v52.34,24.91 | v14.88,22.42 v8.51,22.42 | v48.4,22.97 43.41,22.97 v38.22,28.17
EPD_DC  (via drill 0.3)
  Top 0.15: v79.14,16.95 80.11,15.98 80.39,15.98 80.53,16.12 82.88,16.12 84.68,17.92 84.68,18.27 J1.11 | v46.11,30.52 34.89,41.74 15.71,41.74 14.12,40.15 14.12,39.87 U2.5 14.05,39.8 14.05,39.59 v11.7,37.24 | v4.7,30.25 3.18,30.25 TP11.TP
  Bottom 0.15: v79.14,16.95 59.69,16.95 v46.11,30.52 | v11.7,37.24 v4.7,30.25
EPD_RST  (via drill 0.3)
  Top 0.15: v82.88,15.63 85.17,17.92 85.17,18.27 J1.10 | v19.87,12.93 v80.18,12.93 | v6.22,14.6 3.18,17.64 TP12.TP | v13.56,55.73 16.54,55.73 17.86,57.05 17.86,57.32 U2.21 | v14.26,25.54 14.26,25.33 14.12,25.19 v14.12,21.11
  Bottom 0.15: v80.18,12.93 v82.88,15.63 | v19.87,12.93 18.21,12.93 15.64,10.37 14.12,10.37 | 14.12,10.37 10.45,10.37 v6.22,14.6 | v13.56,55.73 13.56,36.83 14.26,36.13 v14.26,25.54 | 14.12,10.37 v14.12,21.11
FLASH_CS
  Top 0.15: R5.1 49.23,16.33 49.23,16.53 45.56,20.2 45.56,21.24 44.87,21.94 D9.2 44.87,22 44.87,28.45 | 44.87,28.45 48.81,32.39 48.81,44.58 47.64,45.76 47.64,46.03 U1.1 | U2.12 22.98,39.8 22.98,39.59 33.93,28.65 44.59,28.65 44.8,28.45 44.87,28.45
GDR
  Top 0.15: J1.2 89.25,18.34 89.25,18.75 89.46,18.96 113.28,18.96 126.58,5.66 135.44,5.66 164.6,34.82 164.6,41.4 163.91,42.09 Q3.1 163.91,42.16 165.43,43.68 165.43,47.35 R4.2
GND  (via drill 0.3)
  Top 0.3: R2_BAT.1 41.89,56.91 43,56.91 44.24,55.66 45,55.66 45.56,56.22 45.56,56.56 MCP73831.2 45.63,56.7 45.63,56.98 46.18,57.53 47.36,57.53 47.57,57.32 50.2,57.32 50.89,58.02 C2_BAT.2 50.96,58.15 50.96,59.19 55.6,63.83 56.29,63.83 C1_BAT.2 56.5,63.83 66.61,63.83 | SENSOR2.1 69.52,46.94 71.32,46.94 71.8,46.45 73.05,46.45 73.26,46.66 73.26,47.28 72.77,47.77 72.43,47.77 SENSOR2.7 72.91,47.84 73.26,48.18 73.26,48.87 72.88,49.26 | 72.88,49.26 72.77,49.36 72.43,49.36 SENSOR2.5 | 81.15,60.47 81.15,60.44 80.67,59.95 80.25,59.95 U4.4 80.46,59.82 80.46,53.58 | 80.46,53.58 80.46,52.82 C10_SUPERCAP.1 80.25,52.61 80.32,52.68 84.68,52.68 85.38,51.99 C8.2 85.31,51.85 84.62,51.16 82.88,51.16 80.67,48.94 80.67,48.53 U3.13 | 72.88,49.26 77.21,53.58 80.46,53.58 | 66.61,63.83 67.44,63.83 68.96,62.31 C2.2 69.1,62.24 73.12,62.24 C1.2 73.26,62.17 79.35,62.17 80.04,61.48 U4.1 80.25,61.48 80.67,61.48 81.08,61.06 81.08,60.85 U4.9 81.15,60.72 81.15,60.5 81.15,60.47 | 52.41,109.33 52,108.91 52,107.39 C6.2 | 52.41,109.33 52.41,110.58 51.58,111.41 51.45,111.41 BOOT_BUTTON.1 51.24,111.48 47.91,111.48 BOOT_BUTTON.2 47.77,111.34 29.01,111.34 28.18,110.51 28.04,110.44 | 64.5,108.33 63.84,108.98 63.7,108.98 63.49,109.19 | 64.5,108.33 65.57,107.25 68.76,107.25 C5.2 | 63.49,109.19 63.49,110.44 64.33,111.27 64.46,111.27 RESET_BUTTON.2 64.6,111.34 67.99,111.34 RESET_BUTTON.1 | 64.5,108.33 63.08,106.91 63.08,102.2 65.29,99.98 65.43,99.98 IC1.3 65.57,99.91 66.68,98.8 66.68,96.86 C_DELAY.2 66.61,96.73 66.61,63.83 | 52.41,109.33 52.55,109.26 63.36,109.26 63.49,109.19
  Top 0.3: J4.G1 17.37,87.52 17.37,88.42 18.21,89.25 18.21,92.29 17.37,93.12 J4.G2 17.44,93.26 17.44,94.23 28.04,104.83 28.04,105.8 27.35,106.49 C10.2 27.28,106.63 27.28,108.43 28.04,109.19 28.04,110.44 | 28.04,110.44 27.21,111.27 27.07,111.27 CHANGE_BUTTON.1 26.86,111.34 23.54,111.34 CHANGE_BUTTON.2 23.4,111.27 22.78,110.64 22.71,110.64 22.5,110.44 22.5,109.19 24.78,106.91 24.78,106.49 24.3,106 16.13,106 14.81,104.69 C9.2 14.67,104.62 14.67,102.06 7.4,94.79 6.78,94.79 J4.P6 | U2.29_1 13.5,45.9 13.5,47.07 U2.29_2 | U2.29_3 13.5,48.32 13.5,47.21 U2.29_2 | U2.29_1 13.63,45.9 14.67,45.9 U2.29_4 14.81,45.9 15.92,45.9 U2.29_7 15.99,46.03 15.99,47.07 U2.29_8 | U2.29_5 14.67,47.14 13.63,47.14 U2.29_2 | U2.29_3 13.63,48.39 14.67,48.39 U2.29_6 14.81,48.39 15.92,48.39 U2.29_9 | U2.29_3 13.43,48.46 9.06,52.82 9.06,57.32 U2.28 8.86,57.39 8.65,57.39 1.31,64.73 1.31,78.44 3.11,80.24 TP4.TP 3.11,80.45 3.11,84.4 J4.G3 3.04,84.61 3.04,91.32 6.36,94.65 J4.P6 | J4.P6 6.57,94.79 6.43,94.79 4.08,97.14 4.08,97.56 J4.G4 4.08,97.76 1.65,100.19 1.65,104.14 3.32,105.8 TP5.TP | J2.B1 165.15,60.3 165.15,60.51 J2.A12 165.22,60.65 165.22,61.76 165.71,62.24 J2.MP4 | J2.MP4 165.85,62.31 169.65,62.31 J2.MP2 169.59,62.17 169.59,52.2 J2.MP1 | R2-USB1.1 151.72,64.66 155.67,64.66 158.5,61.82 158.5,61.41 D1.2 158.64,61.89 159.06,62.31 159.89,62.31 160.38,61.82 165.08,61.82 J2.MP4 | J3.1 167.85,21.11 169.24,21.11 172.77,24.64 172.77,49.01 169.72,52.06 J2.MP1 | R2.1 157.54,37.79 153.31,37.79 152.97,37.45 SJ1.1 | C5_USB.2 148.67,50.4 152.55,50.4 153.03,50.88 C4_USB.2 153.17,50.81 156.08,47.9
  Top 0.3: 163.56,47.97 160.93,47.97 R2-USB.2 160.72,47.9 156.08,47.9 | 163.56,47.97 164.11,47.42 R4.1 | J2.B12 165.15,53.86 J2.A1 165.22,53.72 165.22,52.61 165.71,52.13 J2.MP3 | 163.56,47.97 163.63,48.11 163.63,49.98 165.64,51.99 J2.MP3 | SJ1.1 152.83,37.52 152.48,37.52 151.79,38.21 151.79,43.54 156.01,47.77 156.08,47.9 | SJ1.1 152.41,37.38 136.21,21.17 136.21,16.88 C7.2 136.14,16.74 128.87,16.74 127.55,15.43 D3.1 127.41,15.29 v125.96,13.83 | J2.MP1 169.45,52.2 165.85,52.2 J2.MP3 | IC4.2 17.17,9.82 17.17,9.54 17.65,9.05 20.07,9.05 21.81,10.79 C1_BAT2.2 21.74,10.93 v21.18,11.48 | 8.06,13.52 8.44,13.14 8.44,11.06 C3.- | 8.06,13.52 6.57,15.01 6.57,15.91 R1_PWRUSB.1 | 21.15,16.22 21.11,16.26 10.79,16.26 10.69,16.15 | 21.15,16.22 21.88,15.49 C1_BAT1.2 | 8.06,13.52 10.69,16.15 | 10.69,16.15 9.06,17.78 9.06,39.8 U2.1 9.13,39.94 9.13,40.36 v10.93,42.16 | v21.18,16.26 21.15,16.22 | v32.26,19.17 32.26,19.93 D12.1 32.33,20.07 34.83,20.07 35.86,19.03 39.05,19.03 40.37,20.34 D10.1 40.5,20.48 44.8,20.48 D9.1 44.87,20.34 45.49,19.72 v45.49,19.65 | EPD_C5.1 90.36,20.69 94.31,20.69 EPD_C2.1 94.45,20.76 95.14,21.45 95.14,22.35 94.79,22.7 87.38,22.7 87.18,22.49 87.04,22.42 | 92.16,15.84 93.55,15.84 94.17,16.46 EPD_C12.1 | 92.16,15.84 90.71,15.84 J1.MP1 90.57,15.91 88.08,15.91 86.21,17.78 86.21,18.2 J1.8 86.14,18.34 86.14,19.1 85.52,19.72 85.45,19.86 | 85.45,19.86 82.81,19.86 81.71,18.75 81.71,18.34 J1.17 | 85.45,19.86 86.21,20.62 EPD_C6.1 86.35,20.76 87.04,21.45 87.04,22.42 | 83.09,20.9 83.99,20.9 85.72,22.63 86.83,22.63 87.04,22.42 | 83.09,20.9 82.4,20.9 EPD_C7.1 | 83.09,20.9 83.09,22.63 82.88,22.84 77.69,22.84 77.48,22.63 77.48,21.66 78.24,20.9 EPD_C8.1
  Top 0.3: 92.16,14.73 78.24,14.73 77.27,15.7 J1.MP2 77.14,15.84 77.14,17.71 74.09,20.76 EPD_C9.1 73.95,20.69 69.73,16.46 69.17,16.46 EPD_C10.1 69.03,16.53 v68.06,17.5 | 92.16,14.73 98.53,14.73 100.27,16.46 100.27,17.64 99.64,18.27 99.23,18.27 EPD_C1.1 | v92.16,15.63 92.16,15.84 | v92.16,14.66 92.16,14.73 | 66.33,20.69 67.3,21.66 67.3,22.49 EPD_C11.1 | 66.33,20.69 53.45,20.69 D6.1 53.32,20.55 52.48,20.55 v51.58,19.65 | U1.4 47.57,42.3 47.57,42.5 46.39,43.68 46.39,45.97 47.01,46.59 49.02,46.59 51.45,44.16 U1.9 51.38,44.03 51.38,34.4 47.84,30.87 47.84,22.14 49.23,20.76 D8.1 49.3,20.48 49.58,20.2 v49.58,19.65 | v67.03,18.54 67.03,19.93 66.4,20.55 66.33,20.69 | v10.93,43.33 13.36,45.76 U2.29_1 | U4.6 81.15,60.47
  Bottom 0.3: v21.18,11.48 v21.18,16.26 21.32,16.33 30.81,16.33 32.26,17.78 v32.26,19.17 | v92.16,15.63 v92.16,14.66 92.3,14.6 95.42,14.6 96.18,13.83 v125.96,13.83 | v51.58,19.65 v49.58,19.65 v45.49,19.65 | v67.03,18.54 v68.06,17.5 | v10.93,42.16 v10.93,43.33
  pour Top: 76.56,9.86 76.58,9.88 91.22,9.88 91.24,9.86 91.26,9.84 91.28,9.82 91.28,2.18 174.62,2.18 174.62,71.32 94.28,71.32 94.26,71.34 94.24,71.36 94.22,71.38 94.22,72.92 94.24,72.94 94.26,72.96 94.28,72.98 95.92,72.98 95.92,117.42 -1.42,117.42 -1.42,2.48 77.02,2.48 77.02,3.22 76.58,3.22 76.56,3.24 76.54,3.26 76.52,3.28 76.52,9.82 76.54,9.84
  pour Bottom: 76.46,10.36 76.48,10.38 90.82,10.38 90.84,10.36 90.86,10.34 90.88,10.32 90.88,1.18 91.02,1.18 91.02,2.32 91.04,2.34 91.06,2.36 91.08,2.38 175.42,2.38 175.42,71.52 95.68,71.52 95.66,71.54 95.64,71.56 95.62,71.58 95.62,118.22 -1.22,118.22 -1.22,3.18 76.42,3.18 76.42,10.32 76.44,10.34
GPIO8
  Top 0.15: R1.1 12.39,34.75 12.39,35.51 14.6,37.73 18.55,37.73 20.42,39.59 20.42,39.8 U2.10
I2C_PW
  Top 0.15: 71.18,60.92 73.05,60.92 73.12,60.99 C1.1 | 71.18,60.92 69.1,60.92 C2.1 | 71.18,60.92 71.18,57.53 R1-PINH.2 71.18,57.46 71.32,57.32 71.32,53.58 R2-PINH.2 71.39,53.51 71.39,49.36 72.15,48.6 SENSOR2.6 72.36,48.53 72.15,48.53 71.46,47.84 71.39,47.84 | 71.39,47.84 69.52,47.84 SENSOR2.2 69.45,47.84 32.26,47.84 22.98,57.12 22.98,57.32 U2.17 | SENSOR2.8 72.36,47 72.15,47 71.39,47.77 71.39,47.84
INT_RTC  (via drill 0.3)
  Top 0.15: v17.93,38.69 17.93,39.8 U2.8 | v18.14,37.24 13.22,32.32 v13.15,32.32 | v4.15,15.43 3.18,14.46 TP15.TP | v170.76,17.43 171.52,16.67 R1_PINH1.1 | v84.62,35.3 84.13,35.79 84.13,36.69 82.88,37.93 80.32,37.93 79.42,38.83 79.42,39.18 U3.3 79.35,39.25 79.35,39.59 73.81,45.13 70.28,45.13 67.93,47.49 v26.79,47.49
  Bottom 0.15: v18.14,37.24 17.93,37.45 v17.93,38.69 18,38.69 v26.79,47.49 | v13.15,32.32 13.15,27.68 4.15,18.68 v4.15,15.43 | v170.76,17.43 141.68,17.43 123.81,35.3 v84.62,35.3
IO/BOOT
  Top 0.15: 49.64,109.95 BOOT_BUTTON.4 | 49.64,109.95 47.91,109.95 BOOT_BUTTON.3 | 49.64,106.28 51.72,106.28 51.93,106.08 C6.1 | 49.64,106.28 47.98,106.28 R_BOOT.1 47.98,106.21 25.55,83.78 25.55,57.39 U2.15 | 49.64,106.28 49.64,109.95
IO/CHANGE
  Top 0.15: 25.27,109.81 CHANGE_BUTTON.4 | 25.27,109.81 23.54,109.81 CHANGE_BUTTON.3 | 25.27,105.31 27.21,105.31 C10.1 | 25.27,105.31 23.4,105.31 R_CHANGE.1 23.4,105.24 15.37,97.21 15.37,57.39 U2.23 | 25.27,105.31 25.27,109.81
MISO  (via drill 0.3)
  Top 0.15: 5.26,98.67 5.26,99.84 2.07,103.03 2.07,104 3.32,105.24 3.8,105.24 4.56,106 4.56,107.88 3.32,109.12 TP6.TP | 5.26,98.67 5.26,97.21 6.57,95.89 6.85,95.89 J4.P7 | R8.1 36.28,16.12 35.17,16.12 32.61,18.68 32.12,18.68 31.64,19.17 31.64,20.97 32.26,21.59 D12.2 32.33,21.66 v38.84,28.17 | v46.94,44.1 46.94,44.16 47.57,44.79 U1.2 | v22.29,49.84 17.51,49.84 10.31,57.05 10.31,57.32 U2.27 10.24,57.39 10.24,57.6 9.48,58.36 8.23,58.36 1.86,64.73 v1.86,65.7 | v5.12,98.67 5.26,98.67
  Bottom 0.15: v38.84,28.17 46.94,36.27 v46.94,44.1 46.87,44.1 41.13,49.84 v22.29,49.84 | v5.12,98.67 5.12,74.15 1.86,70.89 v1.86,65.7
MOSI  (via drill 0.3)
  Top 0.15: v5.6,92.22 6.36,91.46 6.85,91.46 J4.P3 6.99,91.46 7.61,91.46 14.88,84.19 v14.88,58.78 | v5.6,110.09 TP7.TP | v81.36,16.95 82.75,16.95 83.16,17.37 83.16,18.27 J1.14 | v41.4,15.98 40.78,15.98 40.64,16.12 R7.1 | v50.06,18.2 50.06,21.94 55.32,27.2 55.32,42.23 U1.5 | v38.15,19.58 36.14,21.59 D11.2 | v16.68,38.69 16.68,39.8 U2.7 | v22.78,50.88 22.78,50.67 23.26,50.19 v23.26,45.41
  Bottom 0.15: v5.6,110.09 v5.6,92.22 | v81.36,16.95 80.39,15.98 50.06,15.98 | 50.06,15.98 v41.4,15.98 41.4,16.05 38.15,19.3 v38.15,19.58 35.17,19.58 16.68,38.07 v16.68,38.69 16.68,38.83 v23.26,45.41 | 50.06,15.98 v50.06,18.2 | v22.78,50.88 v14.88,58.78
N$1  (via drill 0.3)
  Top 0.15: v161.69,47.42 160.93,46.66 R2-USB.1 | v164.18,58.5 164.6,58.91 165.15,58.91 J2.B5
  Bottom 0.15: v161.69,47.42 161.69,56.01 v164.18,58.5
N$2  (via drill 0.3)
  Top 0.15: v153.24,61.82 150.4,64.66 R2-USB1.2 | v159.06,56.01 165.15,56.01 J2.A5
  Bottom 0.15: v159.06,56.01 v153.24,61.82
N$3
  Top 0.15: 16.61,10.37 16.75,10.51 17.51,10.51 | 16.61,10.37 16.54,10.3 16.54,10.23 16.2,9.89 IC4.1 | 17.51,10.51 18,10.03 18,9.89 IC4.3 | 16.61,10.37 11.56,15.43 11.28,15.43 D2.1 | 20.63,14.66 20.63,14.32 18.62,12.31 18.62,11.69 17.51,10.58 17.51,10.51 | 20.63,14.66 20.63,15.43 C1_BAT1.1 | 20.63,14.66 64.6,14.66 102.07,52.13 139.88,52.13 140.5,51.51 141.26,51.51 Q1.2
N$4
  Top 0.15: 130.32,6.91 128.24,6.91 127.62,6.29 D4.1 | 130.32,6.91 131.71,6.91 132.19,6.42 133.71,6.42 C4.1 | 130.32,6.91 130.32,11.89 130.94,12.52 130.94,15.36 D3.2
N$5
  Top 0.15: CHG_LED.C 52.48,63.9 46.18,63.9 45.14,64.94 44.04,64.94 43.41,64.32 R1_BAT.1
N$6
  Top 0.15: R1_BAT.2 44.73,64.25 44.73,60.3 45.14,59.88 45.14,57.32 44.66,56.84 44.66,56.63 MCP73831.1
N$7
  Top 0.15: R2_BAT.2 41.89,58.29 43.76,58.29 44.59,59.12 MCP73831.5
N$8
  Top 0.15: J1.24 78.24,18.27 78.24,17.23 80.32,15.15 98.4,15.15 99.85,16.6 99.85,17.5 99.64,17.71 94.31,17.71 94.24,17.78 EPD_C12.2
N$9
  Top 0.15: J1.20 80.18,18.34 80.18,20.27 78.31,22.14 EPD_C8.2
N$10  (via drill 0.3)
  Top 0.15: v78.8,17.5 79.14,17.85 79.14,18.27 J1.22 | v69.93,17.5 69.38,17.5 69.17,17.71 EPD_C10.2
  Bottom 0.15: v69.93,17.5 v78.8,17.5
N$11
  Top 0.15: J1.19 80.74,18.34 80.74,20.55 82.33,22.14 EPD_C7.2
N$12
  Top 0.15: J1.18 81.22,18.34 81.22,18.82 82.68,20.27 84.55,20.27 86.21,21.94 EPD_C6.2
N$13
  Top 0.15: J1.5 87.73,18.34 87.73,19.23 89.95,21.45 93.89,21.45 94.31,21.87 EPD_C2.2
N$14
  Top 0.15: J1.4 88.22,18.27 88.22,17.92 89.05,17.09 99.16,17.09 EPD_C1.2
N$15
  Top 0.15: C_DELAY.1 67.93,96.86 67.93,99.29 67.65,99.56 67.65,101.09 68.34,101.78 IC1.5
N$16
  Top 0.15: R_CAPACITOR.1 83.51,36.2 79.35,36.2 78.59,36.96 76.65,36.96 76.03,36.34 D7.1
PREVGH
  Top 0.15: 77.07,20.27 75.89,20.27 74.09,22.07 EPD_C9.2 | 77.07,20.27 78.11,20.27 79.63,18.75 79.63,18.34 J1.21 | 77.07,20.27 77.07,22.77 77.55,23.25 109.41,23.25 121.25,11.41 127.55,11.41 D5.1
PREVGL  (via drill 0.3)
  Top 0.15: v77.55,19.79 78.66,18.68 78.66,18.34 J1.23 | v66.68,21.8 66.68,21.94 66.13,22.49 EPD_C11.2 | v130.11,6.42 130.25,6.29 131.01,6.29 D4.2
  Bottom 0.15: v66.68,21.8 68.69,19.79 v77.55,19.79 77.62,19.79 80.32,22.49 88.7,22.49 92.23,18.96 127.48,18.96 131.91,14.53 131.91,14.25 130.11,12.45 v130.11,6.42
RESE  (via drill 0.3)
  Top 0.15: v112.59,19.44 89.46,19.44 88.7,18.68 88.7,18.34 J1.3 | v139.05,19.44 144.59,19.44 162.66,37.52 162.66,38.62 162.18,39.11 | 162.18,39.11 161.97,39.32 161.69,39.32 R3.2 | 162.18,39.11 163.84,40.77 Q3.2
  Bottom 0.15: v139.05,19.44 v112.59,19.44
RESE'
  Top 0.15: R3.1 161.62,38.07 161.41,38.07 160.38,39.11 157.6,39.11 R2.2 157.54,39.11 157.4,38.97 152.97,38.97 SJ1.2
RESET  (via drill 0.3)
  Top 0.15: RESET_BUTTON.3 64.53,109.81 RESET_BUTTON.4 68.06,109.75 68.06,109.05 69.45,107.67 69.45,106.56 68.83,105.94 C5.1 68.76,105.87 68.69,105.8 65.57,105.8 | 65.57,105.8 64.53,105.8 R_RESET.1 | 65.57,105.8 65.57,102.47 | 65.57,102.47 65.57,101.85 IC1.1 | v23.75,55.73 23.75,45.27 20.84,42.36 12.8,42.36 11.56,41.12 11.56,39.87 U2.3 | v26.86,63.83 v26.86,58.85 | v65.5,102.47 65.57,102.47
  Bottom 0.15: v26.86,58.85 v23.75,55.73 | v65.5,102.47 v26.86,63.83
RTC_RST  (via drill 0.3)
  Top 0.15: v30.46,50.88 24.3,57.05 24.3,57.32 U2.16 | v79.56,40.63 80.6,39.59 80.6,39.25 U3.4
  Bottom 0.15: v30.46,50.88 68.55,50.88 78.8,40.63 v79.56,40.63
RX
  Top 0.15: U2.24 14.05,57.39 14.05,58.36 3.18,69.23 TP2.TP
SCK  (via drill 0.3)
  Top 0.15: J4.P5 6.85,93.61 6.36,93.61 4.36,91.6 4.36,78.03 3.18,76.85 TP8.TP 3.11,76.78 3.11,74.7 1.86,73.46 1.86,68.13 v3.45,66.53 | v80.25,16.46 82.68,16.46 83.65,17.43 83.65,18.27 J1.13 | v51.24,16.46 49.99,15.22 45.97,15.22 45,16.19 R6.1 | v51.24,24.71 51.79,25.26 51.79,39.66 55.32,43.2 55.32,43.47 U1.6 | v43.97,21.87 D10.2 | v18.41,38.21 16.54,38.21 15.37,39.39 15.37,39.8 U2.6 15.57,39.11 v15.16,38.69
  Bottom 0.15: v51.24,16.46 52.34,16.46 | 52.34,16.46 v80.25,16.46 | 51.24,21.87 51.24,20.62 52.34,19.51 52.34,16.46 | 51.24,21.87 v51.24,24.71 | 51.24,21.87 v43.97,21.87 43.9,21.87 27.55,38.21 v18.41,38.21 | v3.45,66.53 14.05,55.94 14.05,38.56 14.4,38.21 14.67,38.21 v15.16,38.69
SCL  (via drill 0.3)
  Top 0.15: SENSOR2.4 69.52,49.43 70,49.91 70,53.51 R2-PINH.1 70.07,53.58 v70.07,55.04 | v82.81,54.76 82.81,60.72 82.61,60.92 82.19,60.92 U4.7 | v77.97,49.91 76.86,48.8 76.86,48.53 U3.16 | v164.39,24.08 167.78,24.08 J3.4 | v21.18,55.11 19.17,57.12 19.17,57.32 U2.20
  Bottom 0.15: v164.39,24.08 135.38,53.1 84.55,53.1 82.88,54.76 v82.81,54.76 v77.97,49.91 77.9,49.91 72.7,55.11 70.07,55.11 | 70.07,55.11 v21.18,55.11 | v70.07,55.04 70.07,55.11
SDA  (via drill 0.3)
  Top 0.15: v81.15,61.76 81.57,61.76 81.85,61.48 82.12,61.48 U4.8 | v70.63,58.29 69.86,57.53 R1-PINH.1 69.8,57.46 68.76,56.42 68.76,49.08 69.24,48.6 69.45,48.6 SENSOR2.3 69.52,48.53 v71.53,48.53 | v166.61,23.11 167.78,23.11 J3.3 | v25.06,62.24 20.49,57.67 20.49,57.39 U2.19 | v77.48,47.35 78.11,47.97 78.11,48.46 U3.15
  Bottom 0.15: v166.61,23.11 127.97,61.76 v81.15,61.76 74.09,61.76 v70.63,58.29 70.56,58.29 65.78,63.07 53.45,63.07 52.62,62.24 v25.06,62.24 | v77.48,47.35 72.7,47.35 v71.53,48.53
SRC
  Top 0.15: 135.1,8.85 135.1,6.42 C4.2 | 135.1,8.85 135.93,9.68 L1.1 136,9.75 138.84,12.59 138.84,14.8 138.56,15.08 138.56,19.58 138.91,19.93 144.66,19.93 162.38,37.66 162.38,38.49 162.25,38.62 161.28,38.62 161,38.9 161,40.36 164.74,44.1 164.74,47.77 165.08,48.11 165.91,48.11 166.05,47.97 166.05,46.87 165.98,46.8 165.98,41.53 Q3.3 | D5.2 131.15,11.34 132.54,11.34 135.03,8.85 135.1,8.85
SS_SD  (via drill 0.3)
  Top 0.15: 51.96,16.5 51.1,17.37 51.1,19.79 53.38,22.07 D6.2 | 51.96,16.5 52.48,15.98 53.52,15.98 R10.1 | v4.7,68.4 4.7,88.48 6.57,90.36 7.26,90.36 J4.P2 | v12.04,40.98 12.04,40.84 12.8,40.08 12.8,39.87 U2.4 12.8,39.8 12.8,39.59 11.21,38 11.21,33.64 14.74,30.11 14.74,25.4 14.4,25.05 14.4,22.28 14.74,21.94 16.61,21.94 23.61,14.94 50.41,14.94 51.96,16.5
  Bottom 0.15: v4.7,68.4 2.97,66.67 2.97,63.35 12.04,54.28 v12.04,40.98
TX
  Top 0.15: U2.25 12.8,57.39 12.8,57.6 5.26,65.15 3.18,65.15 TP1.TP
USB_D+  (via drill 0.3)
  Top 0.15: v91.96,52.41 140.36,52.41 140.98,53.03 140.98,53.17 147.77,59.95 158.37,59.95 159.47,61.06 159.47,61.34 D1.1 | v37.11,40.15 v48.33,40.15 | v26.38,40.15 25.82,40.15 25.55,39.87 U2.14
  Bottom 0.15: v91.96,52.41 79.7,40.15 v48.33,40.15 | v26.38,40.15 v37.11,40.15
USB_D-  (via drill 0.3)
  Top 0.15: v83.3,55.59 89.05,61.34 157.6,61.34 D1.3 | v50.41,55.59 50.2,55.59 42.93,48.32 v32.47,48.32 | v25.13,40.98 24.3,40.15 24.3,39.87 U2.13
  Bottom 0.15: v50.41,55.59 v83.3,55.59 | v25.13,40.98 v32.47,48.32
VBAT  (via drill 0.3)
  Top 0.3: v48.33,58.02 49.58,58.02 C2_BAT.1 | v47.22,56.91 46.87,56.91 46.6,56.63 MCP73831.3 | v4.22,71.93 3.18,72.97 TP3.TP | U4.2 80.18,60.92 80.18,60.51 U4.3 80.04,60.51 79.7,60.51 v79.42,60.23 | v86.07,53.58 140.29,53.58 Q1.3
  Bottom 0.3: v4.22,71.93 14.6,71.93 29.56,56.98 47.08,56.98 v47.22,56.91 v48.33,58.02 48.47,57.95 59.27,57.95 59.96,57.25 76.38,57.25 79.28,60.16 v79.42,60.23 v86.07,53.58
VBUS  (via drill 0.3)
  Top 0.3: 147.42,51.71 147.42,56.7 PFMF.050.1.2 147.56,56.77 149.64,58.85 152.76,58.85 153.66,57.95 158.02,57.95 158.5,58.43 158.5,58.85 D1.5 | 147.42,51.71 147.42,50.4 C5_USB.1 147.29,50.67 140.78,50.67 139.99,51.46 Q1.1 139.32,51.55 139.32,51.58 v137.52,51.58 | 147.42,51.71 153.52,51.71 154.28,50.95 C4_USB.1 | MCP73831.4 46.6,59.19 49.78,62.38 52.48,62.38 CHG_LED.A 52.62,62.52 52.69,62.59 v53.59,62.59 | C1_BAT.1 56.29,62.59 v55.12,62.59 55.05,62.45 55.05,60.99 43.41,49.36 v31.36,49.36 | v8.79,17.3 6.57,17.3 R1_PWRUSB.2 | v10.38,17.3 11,17.3 11.21,17.5 D2.2 11.35,17.57 15.23,21.45 v15.99,21.45 | v3.18,9.12 3.18,6.77 TP14.TP
  Bottom 0.3: v53.59,62.59 v55.12,62.59 55.25,62.59 60.1,57.74 70.83,57.74 73.88,60.78 128.31,60.78 v137.52,51.58 | v10.38,17.3 v8.79,17.3 8.65,17.23 8.09,17.23 3.18,12.31 v3.18,9.12 | v31.36,49.36 26.45,49.36 15.99,38.9 v15.99,21.45
VRTC
  Top 0.15: 80.6,50.05 79.42,48.87 79.42,48.53 U3.14 79.42,48.46 79.42,48.18 83.71,43.89 83.71,38.35 84.82,37.24 84.82,36.2 R_CAPACITOR.2 | 80.6,50.05 82.47,51.92 C8.1 | 80.6,50.05 78.11,52.54 C10_SUPERCAP.2
VUSB
  Top 0.3: J2.A4 165.15,54.69 165.15,54.9 J2.B9 | J2.A9 165.15,59.68 165.15,59.47 J2.B4 165.29,59.4 165.85,59.4 166.4,58.85 166.4,55.52 165.85,54.97 165.29,54.97 J2.B9 | J2.B9 165.01,54.97 153.66,54.97 151.93,56.7 PFMF.050.1.1
(copper drawn outside any net)
  shapes: Top area x10